# Allegro board C112P01-T2-ZDS-PWR-6V-A01.brd
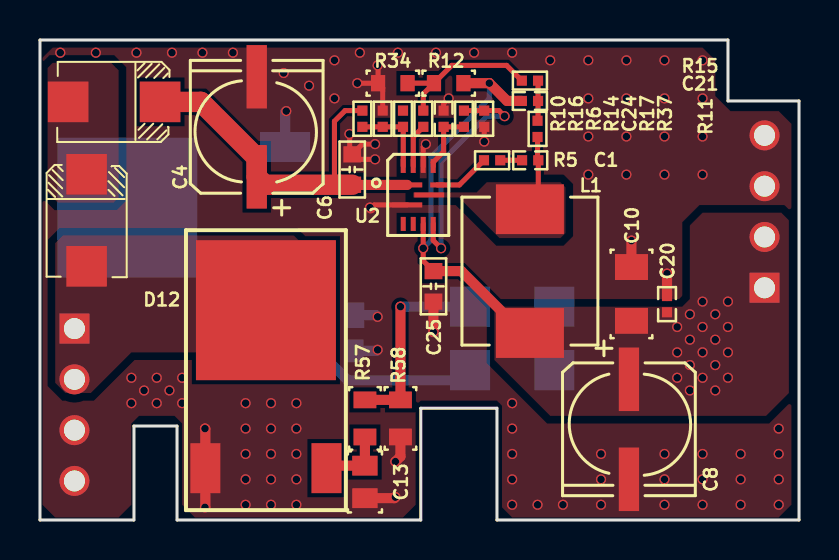
[diagram p0: board, top side]
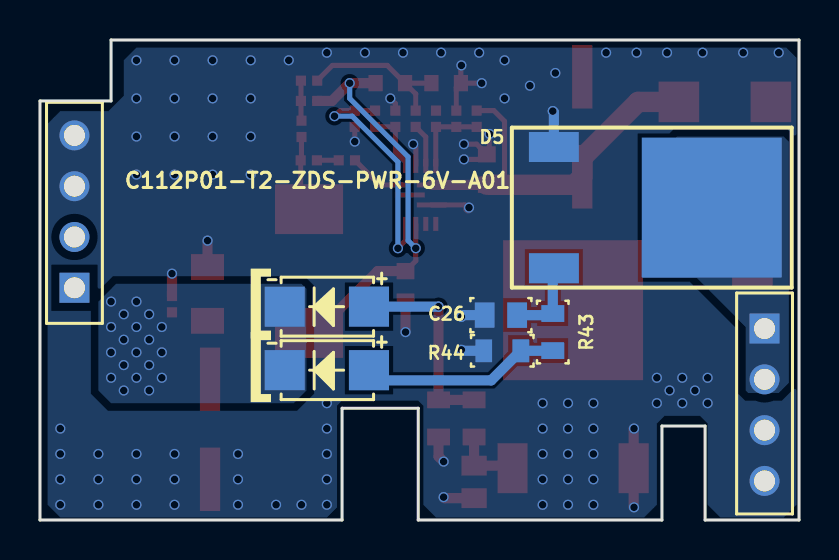
[diagram p1: board, bottom side, seen from below]

Outline 37.97 x 24 mm; copper layers: TOP, BOTTOM. Coordinates in mm from the lower left corner of the outline.
Outline path: 0,24 34.42,24 34.42,20.95 37.97,20.95 37.97,0 22.86,0 22.86,5.59 19.05,5.59 19.05,0 6.86,0 6.86,4.7 4.7,4.7 4.7,0 0,0 0,24

## Design rules (mm)
constraint set DEFAULT: min track width 0.152

## Placement (name value [footprint] x y rotation side)
C1  220NF  [SC0402]  24.52 17.99 0 top
C4  220UF/35V/NC  [SAC6666]  10.84 19.66 90 top
C6  100NF/50V  [SC0603]  15.62 17.53 90 top
C8  220UF/25V/NC  [SAC6666]  29.46 4.54 270 top
C10  22UF  [SC1206]  29.59 11.3 90 top
C13  100NF  [SC0805]  16.26 1.9 270 top
C20  100NF  [SC0402]  31.37 10.8 90 top
C21  150PF/NC  [SC0402]  24.51 20.95 180 top
C24  1UF  [SC0402]  20.19 20.07 90 top
C25  100NF  [SC0603]  19.68 11.68 270 top
C26  100NF  [SC0805]  14.91 10.25 0 bottom
D1  SML4736  [SMA]  23.62 10.67 0 bottom
D5  BT151S-500R  [D-PACK7_7]  4.37 15.62 270 bottom
D6  SML4736  [SMA]  23.62 7.49 0 bottom
D12  BT151S-500R  [D-PACK7_7]  11.3 10.49 0 top
D23  SS36-A  [SMB]  2.33 14.99 90 top
D37  SS36-A  [SMB]  3.71 20.91 0 top
J1  CON4  [XH-4P-254-1]  1.72 9.57 270 bottom
J2  CON4  [XH-4P-254-1]  36.25 11.61 90 bottom
L1  SPM6530T-2R2M  [SPL0707G]  24.51 12.45 270 top
NOREF  -  []  0 24 0 top
R5  3.3R  [SR0402]  22.62 17.99 0 top
R6  100R/NC  [SR0402]  18.16 20.07 270 top
R10  1.5MEG  [SR0402]  16.13 20.07 270 top
R11  100K/NC  [SR0402]  24.89 19.56 90 top
R12  41.2K 1%  [SR0603]  20.45 21.84 180 top
R14  0R  [SR0402]  19.18 20.07 90 top
R15  470R/NC  [SR0402]  24.51 21.97 180 top
R16  1MEG/NC  [SR0402]  17.14 20.07 90 top
R17  100K  [SR0402]  21.21 20.07 90 top
R34  4.42K 1%  [SR0603]  17.65 21.84 180 top
R37  100K/NC  [SR0402]  22.23 20.07 270 top
R43  100R  [SR0805]  12.32 9.4 90 bottom
R44  39R  [SR0805]  14.85 8.46 180 bottom
R57  100R  [SR0805]  16.26 5.08 270 top
R58  39R  [SR0805]  18.03 5.08 90 top
U2  MP8759GD-Z  [QFN12-0R5-0302-MV]  18.92 16.26 270 top

## Library data of the parts
C1 C6 C10 C13 C20 C21 C24-C26 = C_4
C4 C8 = CAP_CED
D1 D6 = BZX84C10/SOT_0
D5 = BZX84C10/SOT_2
D12 = BZX84C10/SOT_1
D23 D37 = D_A_0
J1 J2 = CON4
L1 = L_0
R5 R10-R12 R14-R17 R34 R37 = R_2
R6 = Resistor
R43 R44 R57 R58 = R-0603
U2 = MP8759_1

## Footprints (pads in the part's own frame, mm; a bottom-side part is the same pattern mirrored in y, then rotated)
D-PACK7_7
  rect 1.5x2.5 smd: 1(-3.03,-7.9) 3(3.03,-7.9)
  rect 7x7 smd: 2(0,0)
QFN12-0R5-0302-MV
  rect 0.25x1.5 smd: 1(-0.5,-0.55) 2(0.5,-0.55) 7(0,0.55)
  rect 0.7x0.25 smd: 3(1.45,-0.75) 4(1.45,-0.25) 5(1.45,0.25) 6(1.45,0.75) 9(-1.45,0.75) 10(-1.45,0.25) 11(-1.45,-0.25) 12(-1.45,-0.75)
  rect 0.25x0.7 smd: 8(-0.5,0.95)
SAC6666
  rect 3.175x1.016 smd: 1(-2.5,0) 2(2.5,0)
SC0402
  rect 0.508x0.508 smd: 1(-0.406,0) 2(0.406,0)
SC0603
  rect 0.813x0.889 smd: 1(-0.762,0) 2(0.762,0)
SC0805
  rect 0.991x1.27 smd: 1(-0.813,0) 2(0.813,0)
SC1206
  rect 1.295x1.651 smd: 1(-1.346,0) 2(1.346,0)
SMA
  rect 2.007x2.007 smd: 1(-2.108,0) 2(2.108,0)
SMB
  rect 2.032x2.032 smd: 1(-2.3,0) 2(2.3,0)
SPL0707G
  rect 2.489x3.404 smd: 1(-3.095,0) 2(3.095,0)
SR0402
  rect 0.508x0.508 smd: 1(-0.406,0) 2(0.406,0)
SR0603
  rect 0.711x0.813 smd: 1(-0.737,0) 2(0.737,0)
SR0805
  rect 0.838x1.143 smd: 1(-0.927,0) 2(0.927,0)
XH-4P-254-1
  rect 1.5x1.5 hole 1.05: 1(0,0)
  round 1.5 hole 1.05: 2(2.54,0) 3(5.08,0) 4(7.62,0)

## Nets
6V0_BD: C8.1 C10.1(A) C20.1(A) C21.2(B) C25.1(A) D1.2(ANODE) D6.2(ANODE) J2.1 J2.2 L1.2(B) R12.1(A) U2.5(VOUT)
12V0: D5.2 D12.2 D23.1(A) J1.1 J1.2
GND: C4.2 C6.2(B) C8.2 C10.2(B) C13.2(B) C20.2(B) C24.2(B) C25.2(B) C26.2(B) D5.1 D12.1 J1.3 J1.4 J2.3 J2.4 R16.2(B) R34.2(B) R37.2(B) R44.1 R58.1 U2.2(PGND) U2.10(AGND)
PD6-1: R6.1
N16884317: C21.1(A) R11.2(B) R15.1(A)
N16884321: R17.2(B) R37.1(A) U2.6(MODE)
N16884327: R6.2 R10.2(B) R16.1(A) U2.12(EN)
N16884354: R5.1(A) U2.8(BST)
N16884358: C1.2(B) L1.1(A) R11.1(A) U2.7(SW)
N16884362: R14.1(A) U2.11(FB)
N16884400: C4.1 C6.1(A) D37.2(K) R10.1(A) U2.1(VIN)
N16884597: R12.2(B) R14.2(B) R15.2(B) R34.1(A)
N16884615: C24.1(A) R17.1(A) U2.9(VCC)
N16884627: C1.1(A) R5.2(B)
N16890661: C26.1(A) D5.3 R43.2
N16890937: D6.1(CATHODE) R43.1 R44.2
N16914246: D1.1(CATHODE) R57.1 R58.2
N16914275: C13.1(A) D12.3 R57.2
N17033084: D23.2(K) D37.1(A)

Pads without a net: U2 3 4

## Via types
v1: diameter 0.508, hole 0.381, TOP to BOTTOM, 121 vias

## Routing (per net, layer and track width the routed paths; a pad name or vN(x,y) marks a point on that pad's centre or on a via; arc(x,y) is an arc through that point)
6V0_BD: length 21.6
  TOP w0.254: C25.1 19.17,12.96 v1(19.17,13.59) U2.5
  TOP w0.508: R12.1 v1(22.48,21.84) 23.37,20.95 C21.2 ; L1.2 24.18,9.35 21.08,12.45 C25.1
  BOTTOM w0.254: v1(19.17,13.59) 19.56,13.97 19.56,18.16 22.48,21.08 v1(22.48,21.84)
  vias: v1(31.88,9.65) v1(31.88,8.38) v1(31.88,7.11) v1(32.51,10.29) v1(32.51,9.02) v1(32.51,7.75) v1(32.51,6.48) v1(33.15,10.92) v1(33.15,9.65) v1(33.15,8.38) v1(33.15,7.11) v1(33.78,10.29) v1(33.78,9.02) v1(33.78,7.75) v1(33.78,6.48) v1(34.42,10.92) v1(34.42,9.65) v1(34.42,8.38) v1(34.42,7.11)
GND: length 26.6
  TOP w0.254: R34.2 17.14,21.62 R16.2 ; R34.2 16.92,22.71 v1(16.89,22.73) ; R34.2 v1(15.88,21.84) ; C6.2 15.88,18.03 v1(16.76,18.03) ; C6.2 15.49,18.41 15.49,19.3 v1(15.48,19.3) ; C6.2 16.13,18.8 v1(16.76,18.8) ; v1(20.45,21.08) 20.19,20.83 C24.2 ; U2.2 16.72,15.76 16.55,15.58 ; U2.10 19.17,18.66 v1(19.3,18.8) ; R37.2 v1(22.23,18.92)
  TOP w0.508: C25.2 v1(19.68,9.4) ; R58.1 18.03,3.17 v1(17.78,2.92) ; C20.2 v1(31.37,12.32) ; C13.2 17.73,1.09 v1(17.78,1.14) ; v1(8.25,4.57) 8.27,4.55 D12.1 8.27,0.65 v1(8.25,0.63) ; C10.2 v1(29.59,13.97) ; v1(16.51,15.62) 16.55,15.58
  BOTTOM w0.508: v1(12.32,20.45) 12.27,20.39 D5.1 ; C26.2 16.81,10.25 v1(16.89,10.16) ; v1(16.89,8.51) 16.84,8.46 R44.1
  vias: v1(1.02,23.37) v1(2.79,23.37) v1(4.57,7.11) v1(4.57,5.84) v1(4.83,23.37) v1(5.21,6.48) v1(5.84,7.11) v1(5.84,5.84) v1(6.48,6.48) v1(6.6,23.37) v1(7.11,7.11) v1(7.11,5.84) v1(8.13,23.37) v1(9.65,23.37) v1(10.29,5.84) v1(10.29,4.57) v1(10.29,3.3) v1(10.29,2.03) v1(10.29,0.76) v1(11.56,5.84) v1(11.56,4.57) v1(11.56,3.3) v1(11.56,2.03) v1(11.56,0.76) v1(12.19,22.35) v1(12.83,5.84) v1(12.83,4.57) v1(12.83,3.3) v1(12.83,2.03) v1(12.83,0.76) v1(13.46,21.72) v1(14.73,22.99) v1(14.73,21.08) v1(16,23.37) v1(17.91,23.37) v1(19.81,23.37) v1(21.72,23.37) v1(23.62,23.37) v1(23.62,5.84) v1(23.62,4.57) v1(23.62,3.3) v1(23.62,2.03) v1(23.62,0.76) v1(24.89,0.76) v1(25.53,22.99) v1(26.16,0.76) v1(27.43,22.99) v1(27.43,21.08) v1(27.43,19.18) v1(27.43,17.27) v1(28.07,3.3) v1(28.07,2.03) v1(28.07,0.76) v1(29.34,22.99) v1(29.34,21.08) v1(29.34,19.18) v1(29.34,17.27) v1(31.24,22.99) v1(31.24,21.08) v1(31.24,19.18) v1(31.24,17.27) v1(31.24,3.3) v1(31.24,2.03) v1(31.24,0.76) v1(33.15,22.99) v1(33.15,21.08) v1(33.15,19.18) v1(33.15,17.27) v1(33.15,3.3) v1(33.15,2.03) v1(33.15,0.76) v1(35.05,3.3) v1(35.05,2.03) v1(35.05,0.76) v1(36.96,4.57) v1(36.96,3.3) v1(36.96,2.03) v1(36.96,0.76)
N16884317: length 2
  TOP w0.254: R11.2 24.92,19.99 C21.1 R15.1
N16884321: length 12
  TOP w0.254: v1(23.24,20.19) 22.96,20.47 R37.1 R17.2 ; v1(20.07,13.59) 19.67,13.98 U2.6
  BOTTOM w0.254: v1(20.07,13.59) 20.07,17.91 22.35,20.19 v1(23.24,20.19)
N16884327: length 4
  TOP w0.254: U2.12 18.17,19.65 R6.2 R16.1 16.13,19.66 R10.2
N16884354: length 2.8
  TOP w0.254: R5.1 20.98,16.76 U2.8
N16884358: length 3.8
  TOP w0.254: L1.1 24.93,15.96 C1.2 24.89,18.03 R11.1
N16884362: length 2.2
  TOP w0.254: R14.1 18.67,19.16 U2.11
N16884400: length 19.5
  TOP w0.254: R10.1 15.27,20.47 14.73,19.94 14.73,17.02 14.99,16.76
  TOP w0.508: C6.1 15.63,16.76 U2.1
  TOP w1.016: D37.2 8.05,20.91 10.84,18.11 C4.1 11.24,16.76 C6.1
N16884597: length 8
  TOP w0.254: R12.2 19.18,21.31 R14.2 ; R12.2 R34.1 ; R12.2 20.6,22.73 23.34,22.73 R15.2
N16884615: length 3.2
  TOP w0.254: R17.1 C24.1 20.19,18.41 19.67,17.9 U2.9
N16884627: length 1.1
  TOP w0.254: C1.1 R5.2
N16890661: length 4.1
  BOTTOM w0.508: C26.1 12.4,10.25 R43.2 12.32,12.54 D5.3
N16890937: length 10
  BOTTOM w0.508: R43.1 12.33,8.46 R44.2 15.4,6.98 21.01,6.98 D6.1
N16914246: length 9.9
  TOP w0.508: v1(18.03,10.67) R58.2 R57.1
  BOTTOM w0.508: v1(18.03,10.67) D1.1
N16914275: length 3.4
  TOP w0.508: R57.2 C13.1 14.46,2.72 D12.3

## Copper pours and planes (outline as drawn; the poured copper is in the pictures)
6V0_BD on TOP: 22.86,10.67 32.13,10.67 32.51,11.05 32.51,14.73 33.15,15.37 37.08,15.37 37.47,14.99 37.47,6.35 36.32,5.21 25.53,5.21 22.73,8 22.73,10.54
6V0_BD on BOTTOM: 24.89,11.81 34.16,11.81 35.05,10.92 35.05,6.48 34.42,5.84 25.27,5.84 24.64,6.48 24.64,11.56
12V0 on TOP: 1.27,6.35 0.76,6.86 0.76,13.84 1.14,14.22 12.7,14.22 13.46,13.46 13.46,9.65 12.19,8.38 4.57,8.38 2.54,6.35
12V0 on BOTTOM: 1.02,6.35 0.51,6.86 0.51,18.92 0.76,19.18 6.1,19.18 6.48,18.8 6.48,13.46 2.67,9.65 2.67,6.48 2.54,6.35
GND on TOP: 0.13,23.11 0.13,0.76 0.76,0.13 3.94,0.13 4.57,0.76 4.57,4.83 4.95,5.21 6.73,5.21 7.11,4.83 7.11,0.76 7.75,0.13 18.16,0.13 18.8,0.76 18.8,5.71 19.05,5.97 22.86,5.97 23.11,5.71 23.11,0.63 23.62,0.13 36.96,0.13 37.59,0.76 37.59,19.81 36.96,20.45 34.54,20.45 33.78,21.21 33.78,22.99 33.15,23.62 0.64,23.62 ; 2 cut-outs
GND on BOTTOM: 0.13,23.11 0.13,0.76 0.76,0.13 3.94,0.13 4.57,0.76 4.57,4.83 4.95,5.21 6.73,5.21 7.11,4.83 7.11,0.76 7.75,0.13 18.16,0.13 18.8,0.76 18.8,5.71 19.05,5.97 22.86,5.97 23.11,5.71 23.11,0.63 23.62,0.13 36.96,0.13 37.59,0.76 37.59,19.81 36.96,20.45 34.54,20.45 33.78,21.21 33.78,22.99 33.15,23.62 0.64,23.62
N16884358 on TOP: 18.67,16.38 21.84,16.38 22.35,16.89 26.04,16.89 26.29,16.64 26.29,14.35 26.04,14.1 22.99,14.1 20.95,16.13 18.67,16.13
N17033084 on TOP: 0.89,15.87 3.68,15.87 3.94,16.13 3.94,22.48 3.56,22.86 0.64,22.86 0.38,22.61 0.38,16.38

## Text on the board
Ref Des/Silkscreen Bottom: C112P01-T2-ZDS-PWR-6V-A01
PLACE_BOUND_BOTTOM: D5 | C26 | R44 | D1 | D6 | R43
User.10: FIGURE | SIZE | 15.0 | 41.339 | DRILL CHART: TOP to BOTTOM | ALL UNITS ARE IN MILS | TOLERANCE | +2.0/-2.0 | +0.0/-0.0 | PLATED | QTY | 121 | 8
